# Altium PCB 远程医疗完成2014-11-06.PcbDoc
Units mm, origin at the board's own origin, x right, y up, seen from the top; angles counter-clockwise.
Board outline 50 x 100 mm, 4 copper layers (Top Layer, Internal Plane 1, Internal Plane 2, Bottom Layer); 81 components, 84 nets, 357 pads, 200 vias.
Unrouted connection lines stored in the file: 8.
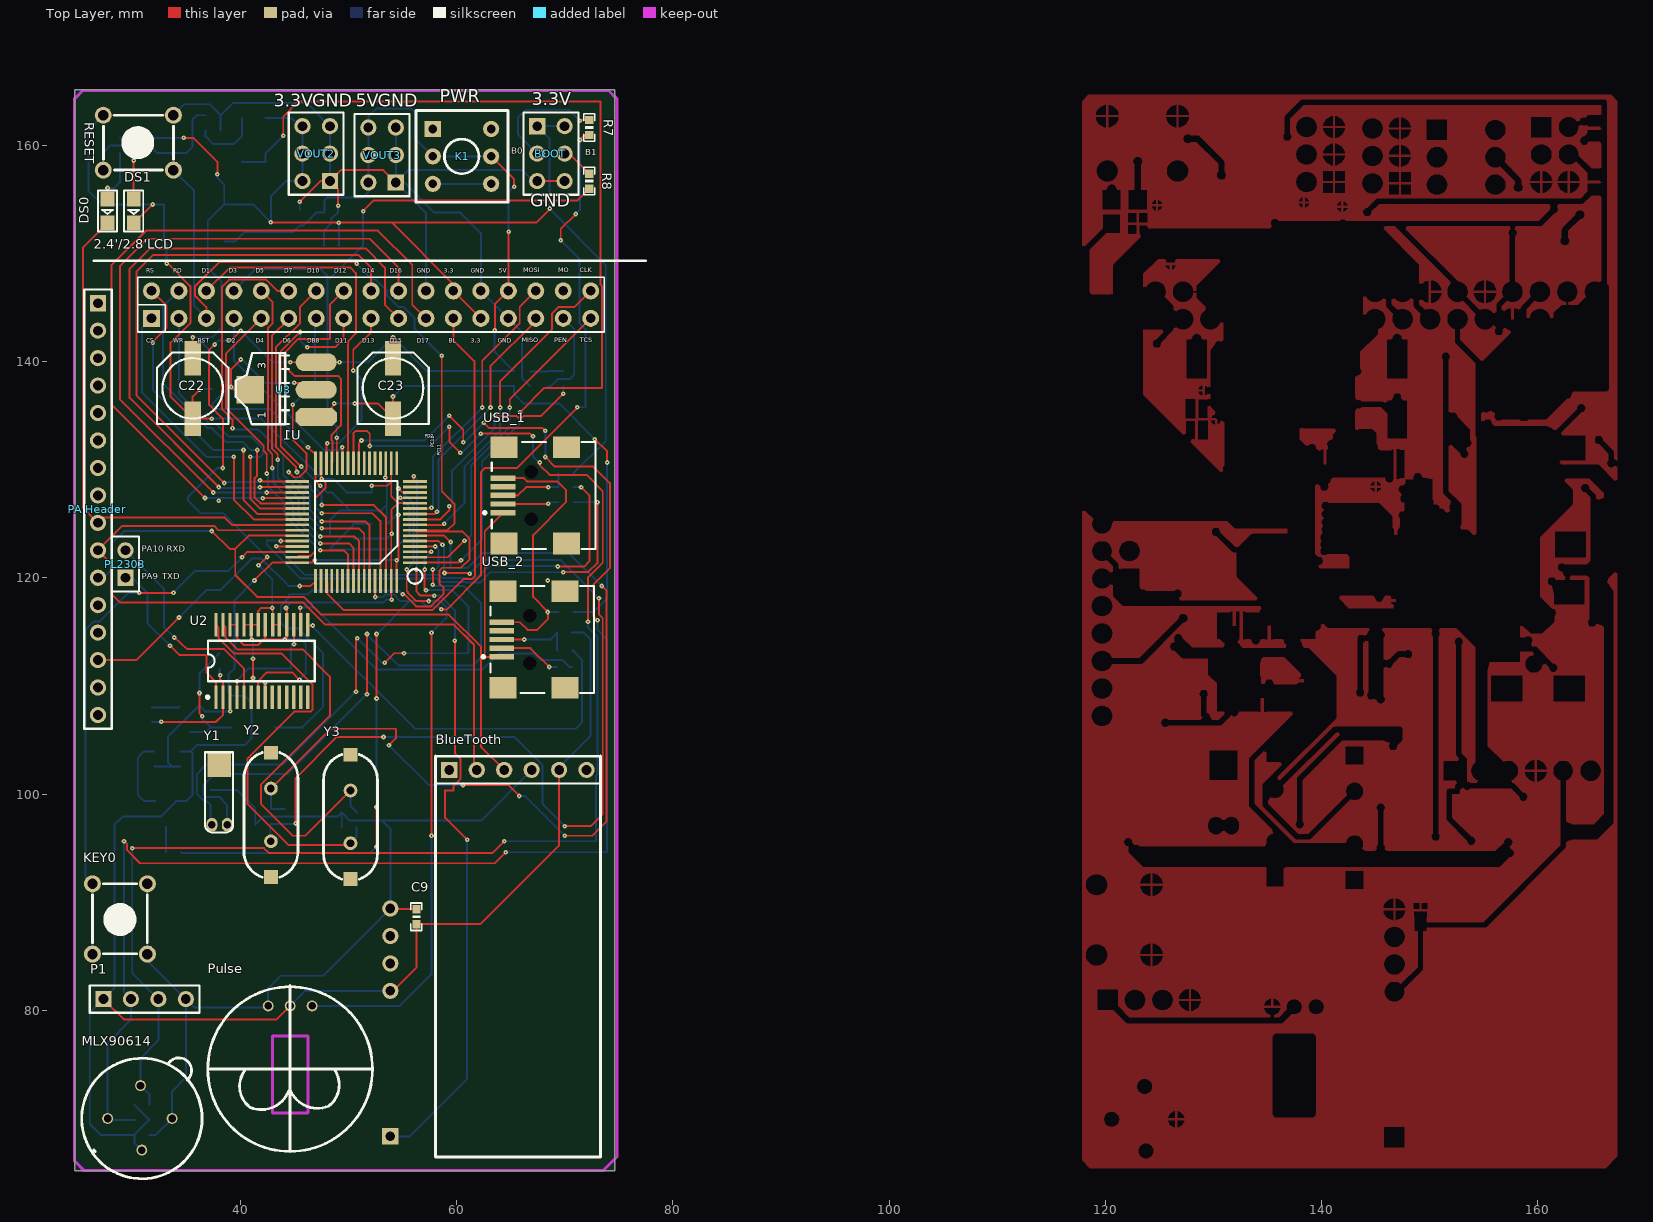
[diagram p0: Top Layer view]
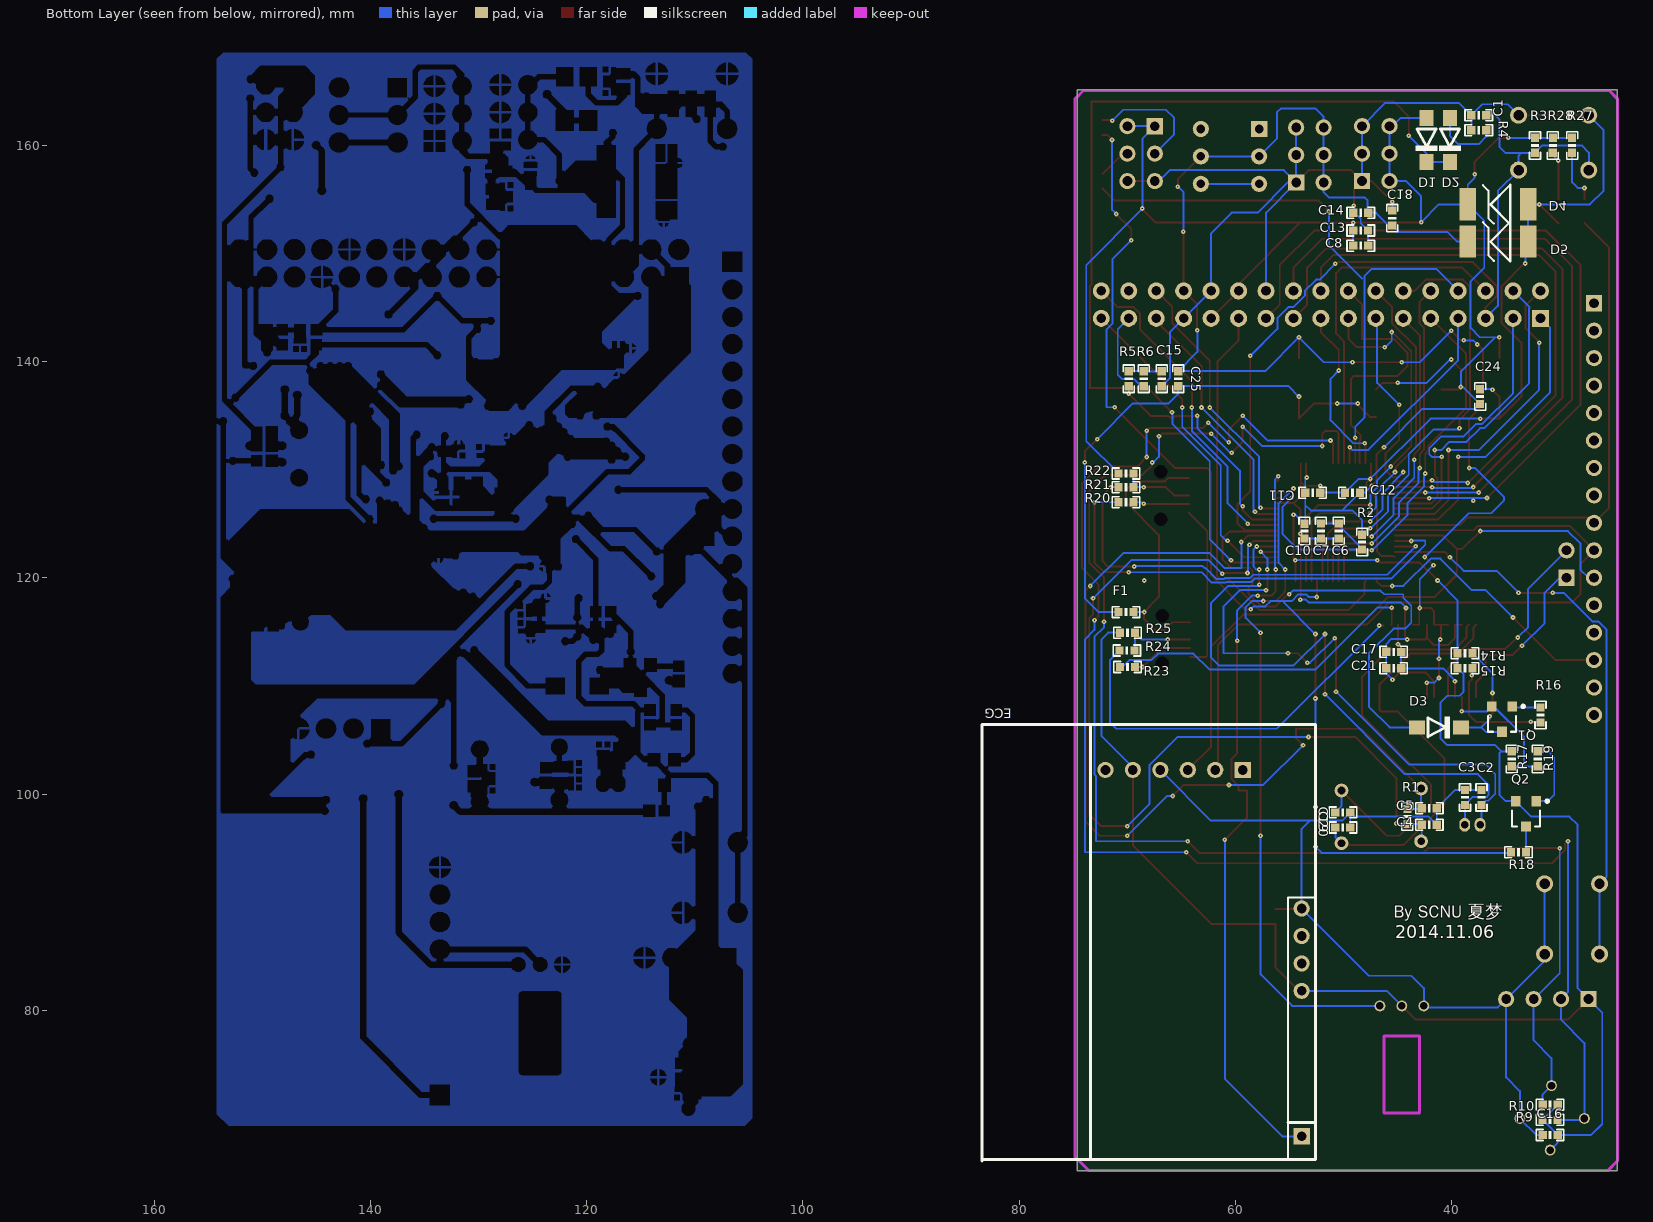
[diagram p1: Bottom Layer view, seen from below]
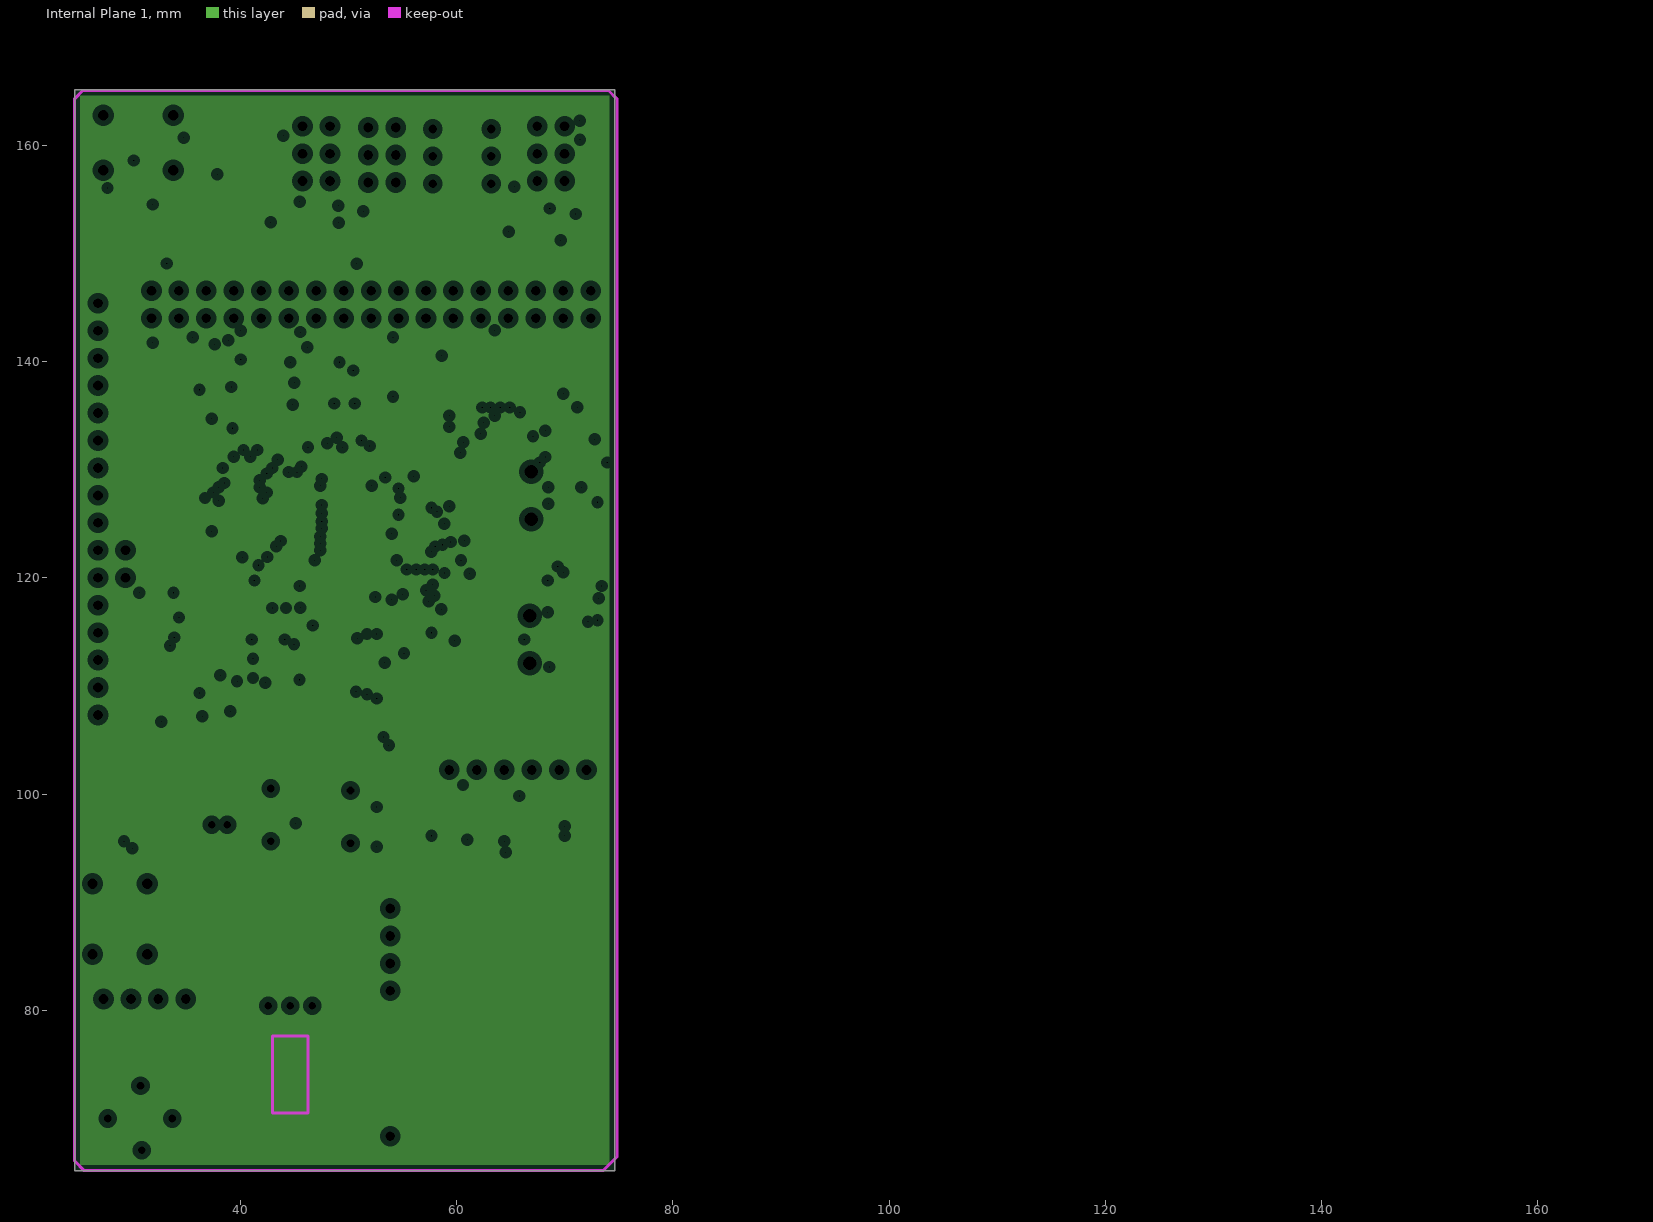
[diagram p2: Internal Plane 1, clearances drawn from the general rule]
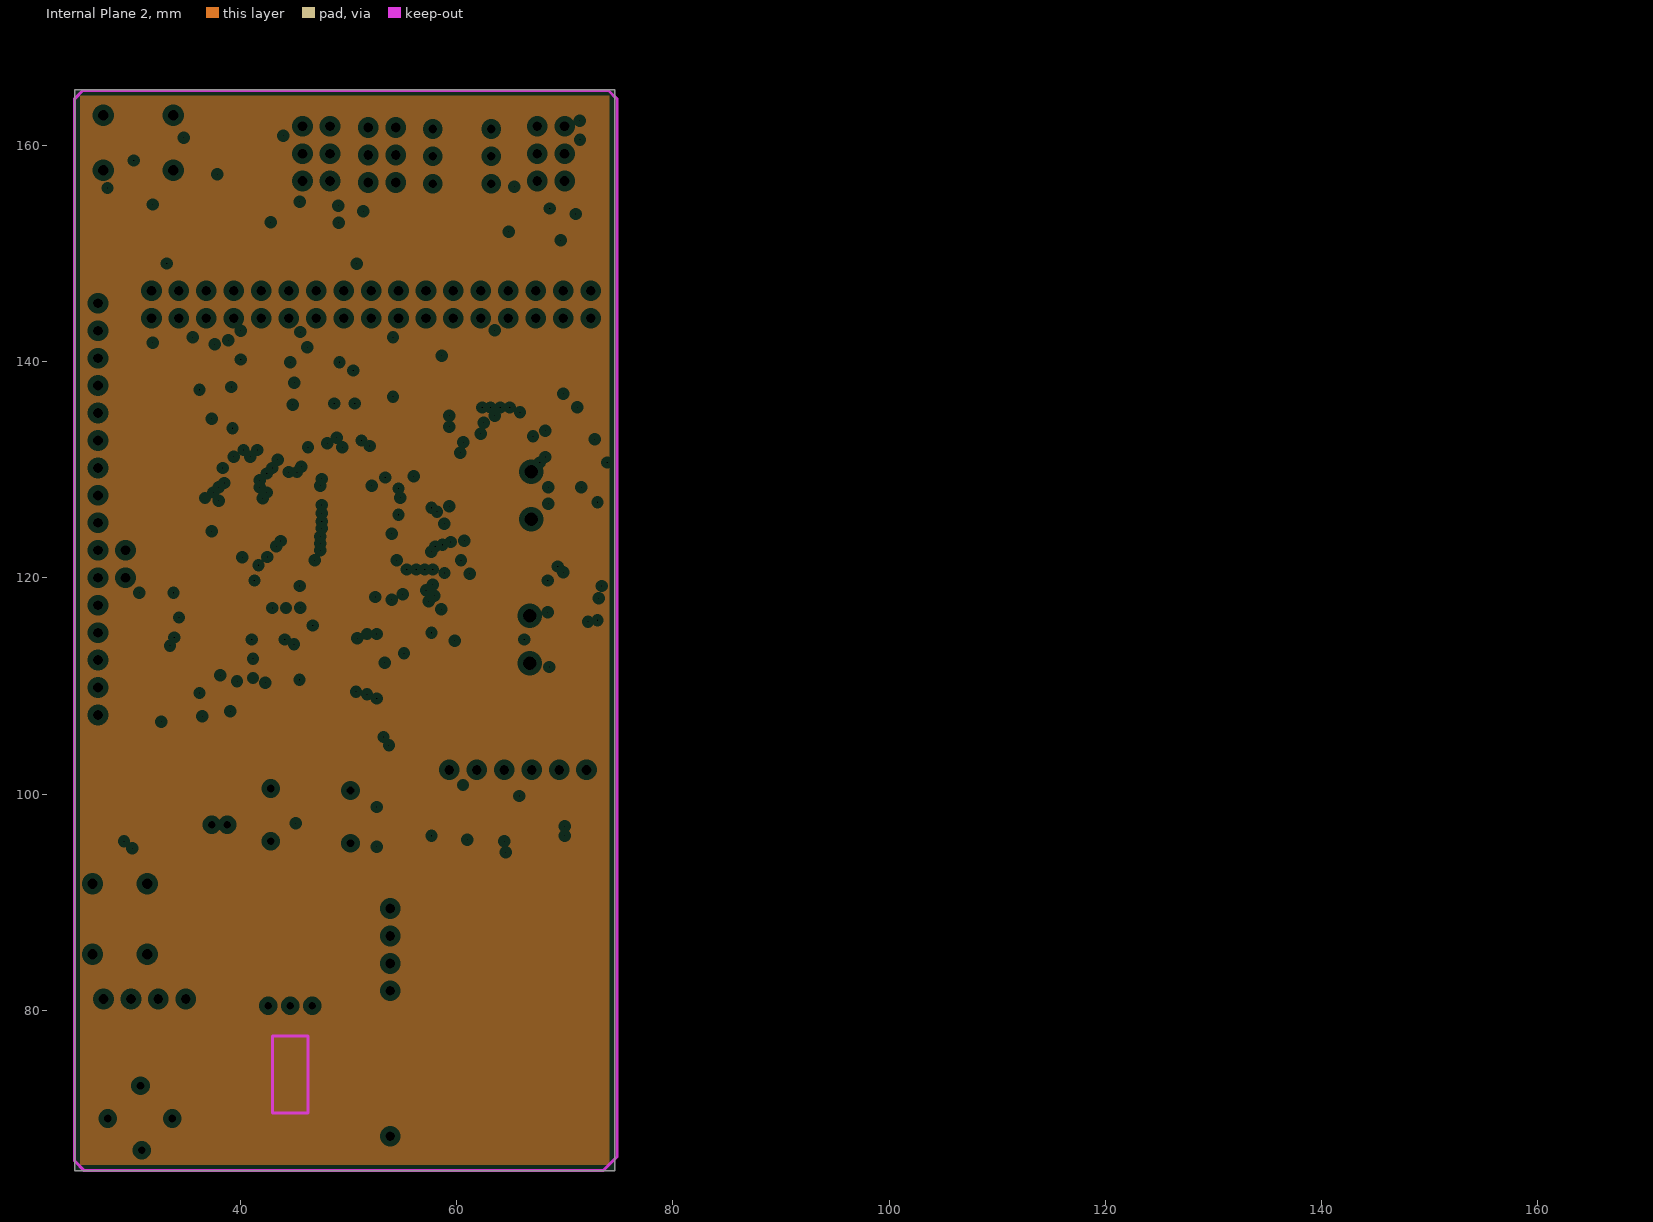
[diagram p3: Internal Plane 2, clearances drawn from the general rule]

## Layer stack, top to bottom
Top Layer: signal copper 0.0356
Dielectric: dielectric 0.32, FR-4, Dk 4.8
Internal Plane 1: plane copper 0.0356
Dielectric: dielectric 0.32, FR-4, Dk 4.8
Internal Plane 2: plane copper 0.0356
Dielectric: dielectric 0.32, FR-4, Dk 4.8
Bottom Layer: signal copper 0.0356

## Board outline
24.638,65.151 74.638,65.151 74.638,165.151 24.638,165.151

## Design rules (kind name [scope] priority, off if disabled: settings)
Clearance [All] p1: gap=0.178
HoleSize [All] p1: absolutevalues=TRUE maxlimit=6.3 minlimit=0.3 maxpercent=80.000 minpercent=20.000
HoleToHoleClearance [All] p1 off: gap=0.254 allowstackedmicrovias=FALSE
LayerPairs [All] p1 off: enforce=TRUE
MinimumSolderMaskSliver [All] p1 off: minsoldermaskwidth=0.254
NetAntennae [All] p1 off: netantennaetolerance=0
PlaneClearance [All] p1: clearance=0.508
PlaneConnect [All] p1: planeconnectstyle=Relief reliefexpansion=0.508 reliefentries=4 reliefconductorwidth=0.254 reliefairgap=0.254
PolygonConnect [All] p1: connectstyle=Relief reliefconductorwidth=0.254 reliefentries=4 polygonreliefangle="90 Angle" airgapwidth=0.254
RoomDefinition 远程医疗 [InComponentClass('远程医疗')] p1: confinementstyle=ConfineIn formatcopy=TRUE lockcomponents=FALSE outline 0,0 50.8,0 50.8,25.4 0,25.4
RoutingVias [All] p1: holewidth=0.127 width=0.432 viastyle="Through Hole" minholewidth=0.127 minwidth=0.432 maxholewidth=0.127 maxwidth=0.432
SilkToSilkClearance [All] p1 off: silktosilkclearance=0.1
SilkToSolderMaskClearance [IsPad] p1 off: minsilkscreentomaskgap=0.1 clearancetoexposedcopper=TRUE
SolderMaskExpansion [All] p1: expansion=0.102
Width [All] p1: maxlimit=0.178 minlimit=0.178 preferedwidth=0.178
19 further rules are at their usual default settings.

## Components (designator, comment, footprint, x,y, rotation, side; value= is the part's Value field where it differs from the comment)
2.4'/2.8'LCD "TFT_LCD" DB2*17 57.15,118.618 r0 top
BlueTooth "BlueTooth" BlueTooth 59.309,102.235 r0 top
BOOT "VCC5" HDR2X3 67.437,161.798 r270 top
C1 "104" 0603P#1 37.465,162.814 r180 bottom
C2 "22pF" 0603P#1 37.211,99.695 r270 bottom
C3 "22pF" 0603P#1 38.735,99.695 r270 bottom
C4 "22pF" 0603P#1 42.037,97.155 r0 bottom
C5 "22pF" 0603P#1 42.037,98.679 r0 bottom
C6 "104" 0603P#1 50.419,124.333 r90 bottom
C7 "10u" 0603P#1 52.07,124.333 r90 bottom
C8 "104" 0603P#1 48.387,150.749 r180 bottom
C9 "104" 0603P#1 56.261,88.646 r90 top
C10 "104" 0603P#1 53.594,124.333 r270 bottom
C11 "104" 0603P#1 52.832,127.889 r180 bottom
C12 "104" 0603P#1 49.149,127.889 r0 bottom
C13 "104" 0603P#1 48.387,152.146 r0 bottom
C14 "104" 0603P#1 48.387,153.797 r180 bottom
C15 "22pF" 0603P#1 66.802,138.43 r270 bottom
C16 "100nF" 0603P#1 30.861,68.453 r180 bottom
C17 "104" 0603P#1 45.339,113.157 r180 bottom
C18 "104" 0603P#2 45.466,153.289 r90 bottom
C19 "22" 0603P#1 50.038,98.298 r0 bottom
C20 "22" 0603P#1 50.038,96.901 r0 bottom
C21 "10u" 0603P#1 45.339,111.633 r180 bottom
C22 "220uF" CC6.56.5 35.56,137.541 r270 top
C23 "220uF" CC6.56.5 54.102,137.541 r270 top
C24 "104" 0603P#1 37.338,136.779 r270 bottom
C25 "104" 0603P#1 65.278,138.43 r90 bottom
D1 "1N4148" DIODE_SOP 42.291,160.528 r270 bottom
D2 "1N4148" DIODE_SOP 40.132,160.528 r270 bottom
D3 "1N4148" DIODE_SOP 41.148,106.172 r180 bottom
D4 "SMBJ5.0A" SMBJ 35.56,154.559 r0 bottom
D5 "SMBJ3.3A" SMBJ 35.56,151.13 r0 bottom
DS0 "LED0" SMDLED 27.688,155.068 r270 top
DS1 "PWR" SMDLED 30.101,155.068 r270 top
ECG "ECG" ECG 53.848,68.326 r90 bottom
F1 "500mA" 0603P#1 70.104,116.84 r180 bottom
K1 "BUTTON" BTN8.5*8.5 57.785,161.544 r0 top
KEY0 "KEY_M" KEY_M 31.369,91.694 r270 top
MLX90614 "MLX90614" MLX90614 30.734,73.025 r90 top
P1 "Header 4" HDR1X4 27.305,81.026 r0 top
"PA Header" "Header 16" HDR1X16 26.797,145.415 r270 top
PL2303 "UART" HDR1X2 29.337,120.015 r90 top
Pulse "Pulse" Pulse 46.609,80.391 r180 top
Q1 "8050" SOT-23R 35.306,107.061 r0 bottom
Q2 "8550" SOT-23R 33.083,98.298 r0 bottom
R1 "1M" 0603P#1 44.069,97.917 r90 bottom
R2 "10R" 0603P#1 48.26,123.317 r270 bottom
R3 "10K" 0603P#1 32.258,160.02 r90 bottom
R4 "0R" 0603P#1 37.465,161.417 r180 bottom
R5 "4.7K" 0603P#1 69.85,138.43 r90 bottom
R6 "10R" 0603P#1 68.453,138.43 r270 bottom
R7 "100K" 0603P#1 72.263,161.671 r90 top
R8 "100K" 0603P#1 72.263,156.718 r270 top
R9 "4.7K" 0603P#1 30.861,69.85 r0 bottom
R10 "4.7K" 0603P#1 30.861,71.247 r180 bottom
R14 "10K" 0603P#1 38.735,113.03 r180 bottom
R15 "10K" 0603P#1 38.735,111.633 r0 bottom
R16 "1K" 0603P#1 31.75,107.315 r90 bottom
R17 "10K" 0603P#1 34.417,103.251 r90 bottom
R18 "1K" 0603P#1 33.782,94.615 r0 bottom
R19 "1K" 0603P#1 32.004,103.251 r90 bottom
R20 "22R" 0603P#1 70.104,127 r180 bottom
R21 "22R" 0603P#1 70.104,128.397 r180 bottom
R22 "1.5K" 0603P#1 70.104,129.667 r180 bottom
R23 "22R" 0603P#1 69.977,111.76 r180 bottom
R24 "22R" 0603P#1 70.028,113.284 r180 bottom
R25 "1.5K" 0603P#1 69.977,114.935 r180 bottom
R27 "510" 0603P#1 28.829,160.02 r90 bottom
R28 "510" 0603P#1 30.607,160.02 r90 bottom
RESET "KEY_M" KEY_M 33.782,157.734 r180 top
U1 "STM32F103RCT6" LQFP64 56.134,121.412 r180 top
U2 "PL2303" ssop28 37.719,108.966 r90 top
U3 "AMS1117-3.3" AMS1117 46.99,134.874 r90 top
USB_1 "USB" USB/SM0.8-6H5 72.136,127.635 r0 top
USB_2 "USB" USB/SM0.8-6H5 72.009,114.3 r0 top
VOUT2 "VCC3.3" HDR2X3 48.26,156.718 r90 top
VOUT3 "VCC5" HDR2X3 54.356,156.591 r90 top
Y1 "32.768MHz" "XTAL 32M" 37.338,97.155 r90 top
Y2 "8MHz" XTAL_US 42.799,95.631 r90 top
Y3 "12MHz" XTAL_US 50.165,100.33 r270 top

## Footprints (in the part's own frame and the unit in brackets; to place one, negate y for a bottom-side part, rotate by r counter-clockwise, add the part's x,y. Pads: shape width x height; smd on the part's side, far side on the other; paste and mask are expansions set on the pad)
0603P#1 [mil]
  rect 30x30 smd: 1(-27,0) 2(27.5,-0.06)
  silkscreen extent -50,-20 50,20
0603P#2 [mil]
  rect 30x30 smd: 1(-27,0) 2(27.5,0.06)
  silkscreen extent -50,-20 50,20
AMS1117 [mil]
  oct 65x150 smd: 1(0.03,-0.06)
  oval 65x150 smd: 2(100.03,-0.06) 3(200.03,-0.06)
  rect 100x100 smd: 4(100.03,239.94)
  silkscreen extent -26,100 234,293
BlueTooth [mm]
  rect 1.5x1.5 hole 0.9: 1(0,0)
  round 1.5 hole 0.9: 2(2.54,0) 3(5.08,0) 4(7.62,0) 5(10.16,0) 6(12.7,0)
  silkscreen extent -1.27,-35.81 13.97,1.27
BTN8.5*8.5 [mm]
  rect 1.5x1.5 hole 0.8: 1(0,0)
  round 1.5 hole 0.8: 2(0,-2.54) 3(0,-5.08) 4(5.4,-5.08) 5(5.4,-2.54) 6(5.4,0)
  silkscreen extent -1.55,-6.79 6.95,1.71
CC6.56.5 [mm]
  rect 3.2x1.5 smd: 1(-2.794,0) 2(2.8,0)
  silkscreen extent -3.3,-3.3 3.3,3.3
DB2*17 [mil]
  rect 62x62 hole 35: 1(-1000,1000)
  round 62 hole 35: 2(-1000,1100) 3(-900,1000) 4(-900,1100) 5(-800,1000) 6(-800,1100) 7(-700,1000) 8(-700,1100) 9(-600,1000) 10(-600,1100) 11(-500,1000) 12(-500,1100) 13(-400,1000) 14(-400,1100) 15(-300,1000) 16(-300,1100) 17(-200,1000) 18(-200,1100) 19(-100,1000) 20(-100,1100) 21(0,1000) 22(0,1100) 23(100,1000) 24(100,1100) 25(200,1000) 26(200,1100) 27(300,1000) 28(300,1100) 29(400,1000) 30(400,1100) 31(500,1000) 32(500,1100) 33(600,1000) 34(600,1100)
  round 133.86 on Top Overlay: ""(-1080,-1935) ""(675,-1935)
  silkscreen extent -1210,-2035 800,1210
DIODE_SOP [mm]
  rect 1.5x1.3 smd: 1(-2.032,0) 2(2.032,0)
  silkscreen extent -1.02,-1.02 1.02,1.02
ECG [mm]
  rect 1.5x1.5 hole 0.9: 1(0,0)
  round 1.5 hole 0.9: 2(13.462,0) 3(16.002,0) 4(18.542,0) 5(21.082,0)
  silkscreen extent -2.29,-1.27 38.1,29.59
HDR1X2 [mm] "Connector; Header; 2 Position"
  rect 1.5x1.5 hole 0.9: 1(0,0)
  round 1.5 hole 0.9: 2(2.54,0)
  silkscreen extent -1.27,-1.27 3.81,1.27
HDR1X4 [mm] "Connector; Header; 4 Position"
  rect 1.5x1.5 hole 0.9: 1(0,0)
  round 1.5 hole 0.9: 2(2.54,0) 3(5.08,0) 4(7.62,0)
  silkscreen extent -1.27,-1.27 8.89,1.27
HDR1X16 [mm]
  rect 1.5x1.5 hole 0.9: 1(0,0)
  round 1.5 hole 0.9: 2(2.54,0) 3(5.08,0) 4(7.62,0) 5(10.16,0) 6(12.7,0) 7(15.24,0) 8(17.78,0) 9(20.32,0) 10(22.86,0) 11(25.4,0) 12(27.94,0) 13(30.48,0) 14(33.02,0) 15(35.56,0) 16(38.1,0)
  silkscreen extent -1.27,-1.27 39.37,1.27
HDR2X3 [mm]
  rect 1.5x1.5 hole 0.9: 1(0,0)
  round 1.5 hole 0.9: 2(0,2.54) 3(2.54,0) 4(2.54,2.54) 5(5.08,0) 6(5.08,2.54)
  silkscreen extent -1.27,-1.27 6.35,3.81
KEY_M [mil]
  round 62 hole 38: 1(0,0) 1(255.91,0) 2(0,-200) 2(255.91,-200)
  silkscreen extent 0,-200 255,0
LQFP64 [mm] "LQFP64"
  rect 2.2x0.254 smd: 1(0,0) 2(0,-0.5) 3(0,-1) 4(0,-1.5) 5(0,-2) 6(0,-2.5) 7(0,-3) 8(0,-3.5) 9(0,-4) 10(0,-4.5) 11(0,-5) 12(0,-5.5) 13(0,-6) 14(0,-6.5) 15(0,-7) 16(0,-7.5) 33(10.9,-7.5) 34(10.9,-7) 35(10.9,-6.5) 36(10.9,-6) 37(10.9,-5.5) 38(10.9,-5) 39(10.9,-4.5) 40(10.9,-4) 41(10.9,-3.5) 42(10.9,-3) 43(10.9,-2.5) 44(10.9,-2) 45(10.9,-1.5) 46(10.9,-1) 47(10.9,-0.5) 48(10.9,0)
  rect 0.254x2.2 smd: 17(1.7,-9.2) 18(2.2,-9.2) 19(2.7,-9.2) 20(3.2,-9.2) 21(3.7,-9.2) 22(4.2,-9.2) 23(4.7,-9.2) 24(5.2,-9.2) 25(5.7,-9.2) 26(6.2,-9.2) 27(6.7,-9.2) 28(7.2,-9.2) 29(7.7,-9.2) 30(8.2,-9.2) 31(8.7,-9.2) 32(9.2,-9.2) 49(9.2,1.7) 50(8.7,1.7) 51(8.2,1.7) 52(7.7,1.7) 53(7.2,1.7) 54(6.7,1.7) 55(6.2,1.7) 56(5.7,1.7) 57(5.2,1.7) 58(4.7,1.7) 59(4.2,1.7) 60(3.7,1.7) 61(3.2,1.7) 62(2.7,1.7) 63(2.2,1.7) 64(1.7,1.7)
  silkscreen extent -0.68,-7.56 9.27,1.95
MLX90614 [mm]
  round 1 hole 0.7: 1(0,0) 2(-3.048,3.048) 3(-5.969,-0.127) 4(-3.048,-2.921)
  silkscreen extent -8.62,-5.7 2.56,5.44
Pulse [mm]
  round 1 hole 0.7: 1(0,0) 2(2.032,0) 3(4.064,0)
  silkscreen extent -5.59,-1.9 9.65,13.46
SMBJ [mm]
  rect 1.5x3 smd: 1(-2.667,0) 2(2.921,0)
  silkscreen extent -1.02,-1.83 1.52,1.85
SMDLED [mm]
  rect 1.4x1.27 smd: 1(0.001,-0.002) 2(2.211,-0.002)
  silkscreen extent -0.8,-0.89 3.01,0.89
SOT-23R [mm]
  rect 0.9x0.95 smd: 1(0.95,-1.048) 2(-0.95,-1.048) 3(0,1.302)
  silkscreen extent -2.07,-1.17 1.3,1.3
ssop28 [mm]
  rect 2.15x0.305 smd: 1(0,0) 2(0,-0.65) 3(0,-1.3) 4(0,-1.95) 5(0,-2.6) 6(0,-3.25) 7(0,-3.9) 8(0,-4.55) 9(0,-5.2) 10(0,-5.85) 11(0,-6.552) 12(0,-7.202) 13(0,-7.852) 14(0,-8.502) 15(6.7,-8.502) 16(6.7,-7.852) 17(6.7,-7.202) 18(6.7,-6.552) 19(6.7,-5.85) 20(6.7,-5.252) 21(6.7,-4.55) 22(6.7,-3.9) 23(6.7,-3.25) 24(6.7,-2.6) 25(6.7,-1.95) 26(6.7,-1.3) 27(6.7,-0.65) 28(6.7,0)
  silkscreen extent -0.12,-9.14 5.22,0.9
USB/SM0.8-6H5 [mm]
  rect 2.3x0.5 smd: 1(-7.85,-1.6) 2(-7.85,-0.8) 3(-7.85,0) 4(-7.85,0.8) 5(-7.85,1.6)
  rect 2.5x2 smd: 6(-7.75,4.45) 7(-1.996,4.45) 8(-7.75,-4.45) 9(-1.996,-4.45)
  round 0.6 hole 1.27 unplated: MH1(-5.25,2.2) MH2(-5.25,-2.2)
  silkscreen extent -9.67,-4.95 0.7,4.95
"XTAL 32M" [mil]
  oval 50x40 hole 28: 1(0,0) 2(0,-56)
  rect 92.13x86 smd: ""(220,-27)
  silkscreen extent -28,-77 264,25
XTAL_US [mil]
  round 50 hole 28: 1(0,0) 2(192.13,0)
  rect 50x50 smd: ""(-130.32,0) ""(322.44,0)
  silkscreen extent -131,-98 323,98

## Part data
BOOT VOUT2 VOUT3: library part "Header 3X2", "Header, 3-Pin, Dual row"
C1 C2 C3 C4 C5 C6 C7 C8 C9 C10 C11 C12 C13 C14 C15 C16 C17 C18 C19 C20 C21 C24 C25: library part C
C22 C23: library part CAP
D1 D2 D3: library part D
D4 D5: library part SMBJ, "TVS"
DS0 DS1: library part LED2, "Typical RED, GREEN, YELLOW, AMBER GaAs LED"
F1 R1 R2 R3 R4 R5 R6 R7 R8 R9 R10 R14 R15 R16 R17 R18 R19 R20 R21 R22 R23 R24 R25 R27 R28: library part R
P1: "Header, 4-Pin"
"PA Header": "Header, 16-Pin"
PL2303: library part "Header 2", "Header, 2-Pin"
Q1: library part NPN, "8050/BCW846/BCW847"
Q2: library part PNP, "8550/BCW68"
U1: library part STM32F103RBT6
U3: library part AMS1117
USB_1 USB_2: library part USB5
Y1 Y2 Y3: library part XTAL, "Crystal Oscillator"

## Via types
v1: diameter 0.432, hole 0.127, Top Layer to Bottom Layer, 200 vias

## Nets (pads, with @x,y where several pads share a name; then routed paths per layer and width w, separated by ;. In a path a pad name is that pad's centre, name@x,y a point inside that pad or via, vN(x,y) a via of type N, cw(c..) or ccw(c..) an arc to the next point about the centre after c; other vN are vias at no path point)
3V3: C17.2 C21.2 U2.4 U2.17 | length 11.2
  Top Layer w0.178: v1@39.624,110.49 v1(39.669,110.445) U2.4 ; v1(44.933,113.868) U2.17@44.933,115.654
  Bottom Layer w0.178: v1@39.624,110.49 40.765,111.631 C21.2 C17.2 44.64,113.576 v1(44.933,113.868)
BOOT0: R7.1 R18.2 U1.60 | length 104.7
  Top Layer w0.178: U1.60 52.434,118.254 v1(52.451,118.237) ; v1(52.578,95.123) v1(52.578,98.806) ; v1(52.578,108.839) v1(52.578,114.808) ; v1(58.547,117.094) 59.097,117.094 62.23,120.227 62.23,129.794 62.611,130.175 65.579,130.175 71.145,135.741 v1(71.145,135.788) ; v1(69.621,151.257) 69.621,152.298 v1@70.993,153.67 ; v1(71.399,160.528) 71.857,160.985 R7.1
  Bottom Layer w0.178: R18.2 34.549,94.548 52.003,94.548 v1(52.578,95.123) ; v1(52.451,118.237) 53.218,118.237 53.447,118.466 54.175,118.466 54.784,117.856 55.499,117.856 ; v1(52.578,98.806) v1(52.578,108.839) ; v1(52.578,114.808) 55.499,117.729 55.499,117.856 ; v1(58.547,117.094) 58.268,117.373 57.204,117.373 56.722,117.856 55.499,117.856 ; v1@69.609,151.244 71.336,149.517 71.336,143.581 71.907,143.01 71.907,135.788 v1(71.145,135.788) ; v1(71.018,153.67) 71.399,154.051 v1(71.399,160.528)
BOOT1: 2.4'/2.8'LCD.8 R8.2 U1.28 | length 56.7
  Top Layer w0.178: U1.28@48.895,130.651 v1(48.895,132.969) ; v1@51.321,153.937 52.324,154.94 71.182,154.94 R8.2
  Bottom Layer w0.178: 2.4'/2.8'LCD.8 41.402,148.59 47.371,148.59 48.044,147.917 48.044,134.836 48.895,133.985 v1(48.895,132.969) ; 48.26,147.701 51.333,150.774 v1(51.333,153.924)
"BT RXD": "PA Header.11" BlueTooth.2 U1.43 | length 71.3
  Top Layer w0.178: 45.234,124.412 37.942,124.412 37.538,124.816 29.058,124.816 26.797,122.555 28.067,121.285 28.067,118.491 28.828,117.73 45.762,117.73 47.795,115.697 59.69,115.697 61.595,113.792 61.595,102.489 BlueTooth.2
"BT TXD": "PA Header.10" BlueTooth.3 U1.42 | length 63.5
  Top Layer w0.178: v1(37.338,124.333) 38.989,122.682 39.497,122.682 ; 45.234,123.912 40.727,123.912 39.497,122.682 ; BlueTooth.3 62.23,104.394 62.23,113.66 59.278,116.611 47.473,116.611 45.847,118.237 41.529,118.237 39.497,120.269 39.497,122.682
  Bottom Layer w0.178: 26.289,120.015 27.305,120.015 28.067,120.777 28.067,123.19 29.21,124.333 v1(37.338,124.333)
ECG: ECG.1 U1.16 | length 70.4
  Top Layer w0.178: v1(56.007,129.413) 56.007,129.039 U1.16 ; v1(56.261,120.777) 56.261,118.745 56.642,118.364 v1(57.912,118.364) ; v1(59.817,114.173) 59.817,103.76 60.326,103.252 60.326,101.375 59.69,100.739 59.69,100.33 58.928,100.33 58.928,97.79 v1(60.96,95.758)
  Bottom Layer w0.178: ECG.1 55.626,68.326 60.96,73.66 v1(60.96,95.758) ; v1(56.007,129.413) 56.337,129.083 56.337,120.853 v1(56.261,120.777) ; v1(57.912,118.364) 58.462,118.364 59.817,117.009 v1(59.817,114.173)
GND: 2.4'/2.8'LCD.22 2.4'/2.8'LCD.26 2.4'/2.8'LCD.27 BlueTooth.4 BOOT.5 BOOT.6 C1.1 C2.1 C3.1 C4.1 C5.1 C6.1 C7.1 C8.2 C9.2 C10.2 C11.2 C12.2 C13.1 C14.1 C15.2 C16.1 C17.1 C18.2 C19.1 C20.1 C21.1 C22.2 C23.2 C24.1 C25.1 D4.1 D5.1 DS1.2 ECG.5 F1.1 KEY0.1 MLX90614.4 P1.4 Pulse.3 R4.1 RESET.2 U1.12 U1.18 U1.31 U1.47 U1.63 U2.7 U2.18 U2.21 U2.25 U2.26 U3.1 VOUT2.1 VOUT2.3 VOUT2.5 VOUT3.1 VOUT3.3 VOUT3.5 | length 382.6
  Top Layer w0.178: RESET.2@27.282,162.814 RESET.2@33.782,162.814 ; DS1.2 30.175,152.857 v1(31.877,154.559) ; v1(33.147,149.098) 33.241,149.098 35.344,146.995 35.344,143.581 33.528,141.765 33.528,136.773 C22.2 ; v1(36.195,137.414) 35.56,136.779 C22.2 ; v1(37.338,134.741) C22.2 ; U2.26 U2.25 39.673,115.662 39.673,114.427 40.308,113.792 41.612,113.792 42.269,114.449 ; U2.7 41.619,110.453 42.418,111.252 44.755,111.252 v1(45.441,110.566) ; U2.21 42.269,114.449 ; v1(44.196,117.221) 44.271,117.146 U2.18 44.271,114.502 v1(44.069,114.3) 42.418,114.3 42.269,114.449 ; U1.47 45.34,122.018 46.444,122.018 46.888,122.462 46.888,127.359 47.854,128.324 47.854,128.803 v1(47.498,129.159) 47.434,129.223 U1.31 ; v1(45.466,154.813) 47.371,156.718 VOUT2.1 ; U3.1 47.499,134.875 v1@48.641,136.017 ; v1(49.022,154.432) 49.022,155.956 VOUT2.1 ; v1(50.546,136.144) 52.699,136.144 C23.2 v1(54.102,136.779) ; v1(52.121,128.524) 53.553,128.524 53.934,128.905 ; ECG.5 53.911,89.344 C9.2 ; U1.18 53.934,128.905 ; v1(53.975,117.983) 53.934,118.024 U1.63 53.934,124.038 v1(53.975,124.079) 53.975,126.336 54.568,126.929 ; VOUT3.1 53.213,157.734 49.276,157.734 VOUT2.1 ; U1.12 56.117,126.929 54.568,126.929 ; BOOT.5 BOOT.6 ; v1@72.771,132.842 73.914,131.699 v1(73.914,130.683) ; 53.934,128.905 53.934,127.563 54.568,126.929
  Bottom Layer w0.178: RESET.2@27.282,162.814 25.908,161.44 25.908,155.829 27.178,154.559 v1(31.877,154.559) D4.1 D5.1 33.147,150.876 v1(33.147,149.098) ; KEY0.1@31.369,91.694 31.369,85.194 31.369,84.582 P1.4 ; C16.1 32.131,68.453 MLX90614.4 33.655,72.517 34.925,73.787 P1.4 ; RESET.2@33.782,162.814 34.798,163.83 37.135,163.83 C1.1 ; v1@36.195,137.465 C24.1 ; C2.1 C3.1 39.649,100.381 C5.1 C4.1 42.113,97.917 48.971,97.917 C19.1 ; v1(37.338,134.741) 41.916,134.741 v1(47.498,129.159) 48.579,129.159 C12.2 52.13,127.891 C11.2 v1@52.133,128.511 ; R4.1 C1.1 ; v1(44.069,114.3) 44.12,114.351 45.542,114.351 46.025,113.868 C17.1 C21.1 46.025,111.176 v1@45.428,110.579 ; v1(44.196,117.221) 44.705,117.73 53.214,117.73 53.467,117.983 v1(53.975,117.983) ; C18.2 v1@45.468,154.811 ; C8.2@47.701,150.76 C13.1 48.387,152.832 48.387,153.213 49.022,153.848 v1(49.022,154.432) ; VOUT2.1 VOUT2.3 VOUT2.5 46.101,163.957 39.294,163.957 C1.1 ; v1(48.664,136.144) v1(50.546,136.144) ; C20.1 C19.1 ; C6.1 C7.1 53.583,123.647 53.975,124.039 v1(53.975,124.079) ; v1(54.102,136.779) 55.067,137.744 C25.1 65.278,137.033 66.167,136.144 69.472,136.144 v1(72.771,132.845) ; VOUT3.5 VOUT3.3 VOUT3.1 ; 2.4'/2.8'LCD.22 57.15,153.797 VOUT3.1 ; C15.2 66.04,138.495 66.04,142.748 2.4'/2.8'LCD.27 2.4'/2.8'LCD.26 62.23,151.892 60.325,153.797 57.912,153.797 55.118,156.591 VOUT3.1 ; BlueTooth.4 62.244,97.55 53.086,97.55 ; BOOT.5 67.056,156.718 66.04,157.734 55.499,157.734 VOUT3.1 ; F1.1 72.644,116.84 73.914,118.11 v1(73.914,130.683) ; P1.4 35.687,80.264 42.418,80.264 Pulse.3 42.545,82.042 43.688,83.185 47.625,83.185 ECG.5 53.848,96.788 53.086,97.55 ; C19.1 50.114,97.536 50.231,97.536 50.245,97.55 53.086,97.55
JTCK: "PA Header.14" U1.49 | length 25.3
  Top Layer w0.178: 26.797,112.395 30.353,112.395 v1(34.29,116.332) ; v1(45.466,119.253) 46.475,119.253 U1.49
  Bottom Layer w0.178: v1(34.29,116.332) 36.83,118.872 38.1,118.872 41.021,121.793 41.905,121.793 44.445,119.253 v1(45.466,119.253)
JTDI: U1.50
JTDO: 2.4'/2.8'LCD.9 U1.55 | length 31.6
  Top Layer w0.178: 2.4'/2.8'LCD.9 38.633,140.741 38.633,135.738 42.139,132.232 42.139,131.745 42.418,131.465 v1(42.418,129.667) ; v1(47.371,122.555) 49.53,122.555 49.934,122.151 U1.55
  Bottom Layer w0.178: v1(42.418,129.667) 42.545,129.54 42.545,128.452 44.069,126.928 44.069,125.81 47.324,122.555 v1(47.371,122.555)
JTMS: KEY0.2 U1.46 | length 52.9
  Top Layer w0.178: v1(30.607,118.618) v1(33.782,118.618) ; v1(40.132,121.92) 40.624,122.412 U1.46
  Bottom Layer w0.178: KEY0.2@26.289,85.194 26.289,91.694 25.654,92.329 25.654,115.23 26.376,115.952 26.925,115.952 29.591,118.618 v1(30.607,118.618) ; v1(33.782,118.618) 35.814,120.65 38.862,120.65 v1(40.132,121.92)
JTRST: 2.4'/2.8'LCD.10 U1.56 | length 32.3
  Top Layer w0.178: 2.4'/2.8'LCD.10 42.964,145.504 42.964,143.581 42.545,143.162 42.545,131.841 42.926,131.46 v1(42.926,130.175) ; v1(47.371,123.19) 50.038,123.19 50.434,122.794 U1.56
  Bottom Layer w0.178: v1(42.926,130.175) 43.053,130.048 43.053,128.778 44.831,127 44.831,125.683 47.324,123.19 v1(47.371,123.19)
"LCD BL": 2.4'/2.8'LCD.23 U1.51 | length 41.5
  Top Layer w0.178: U1.51 48.04,119.606 48.04,118.502 49.524,117.018 57.751,117.018 60.647,119.913 61.414,119.913 61.697,120.196 61.697,133.201 61.62,133.277 61.62,140.056 59.69,141.986 2.4'/2.8'LCD.23
"LCD CS": 2.4'/2.8'LCD.1 U1.40 | length 28.8
  Top Layer w0.178: v1@39.37,131.191 39.37,127.254 41.212,125.412 U1.40
  Bottom Layer w0.178: 2.4'/2.8'LCD.1 30.861,143.129 30.861,137.16 36.822,131.199 v1(39.37,131.199)
"LCD D0": 2.4'/2.8'LCD.6 U1.26 | length 32.9
  Top Layer w0.178: 2.4'/2.8'LCD.6 38.989,148.717 50.165,148.717 50.673,148.209 50.673,142.621 49.934,141.882 U1.26
"LCD D1": 2.4'/2.8'LCD.7 U1.27 | length 18.7
  Top Layer w0.178: U1.27 v1@49.434,131.922
  Bottom Layer w0.178: 2.4'/2.8'LCD.7 39.37,140.161 47.679,131.851 49.174,131.851 v1(49.403,132.08)
"LCD D5": 2.4'/2.8'LCD.11 U1.57 | length 30.1
  Top Layer w0.178: v1(43.434,130.937) 43.434,131.455 42.901,131.989 42.901,142.408 44.45,143.957 2.4'/2.8'LCD.11 ; v1(47.371,123.825) 50.546,123.825 50.934,123.437 U1.57
  Bottom Layer w0.178: v1(43.434,130.937) 43.434,129.286 45.339,127.381 45.339,125.857 v1(47.371,123.825)
"LCD D6": 2.4'/2.8'LCD.12 U1.58 | length 42.9
  Top Layer w0.178: v1(39.243,133.858) 39.243,134.625 38.278,135.59 38.278,146.957 38.933,147.612 42.347,147.612 43.401,146.558 2.4'/2.8'LCD.12 ; v1(47.498,124.587) 50.927,124.587 51.434,124.08 U1.58
  Bottom Layer w0.178: v1(39.243,133.858) 39.37,133.731 41.656,133.731 43.942,131.445 43.942,129.54 45.847,127.635 45.847,126.191 47.451,124.587 v1(47.498,124.587)
"LCD D7": 2.4'/2.8'LCD.13 U1.59 | length 33.1
  Top Layer w0.178: v1(44.45,129.794) 44.933,129.311 45.412,129.311 46.076,129.975 46.076,131.55 44.82,132.806 44.82,136.006 v1(44.831,136.017) ; v1(47.498,125.222) 51.544,125.222 51.934,124.832 U1.59
  Bottom Layer w0.178: v1@44.45,129.757 46.355,127.852 46.355,126.365 v1(47.498,125.222) ; v1(44.831,136.017) 46.863,138.049 46.863,143.891 2.4'/2.8'LCD.13
"LCD D8": 2.4'/2.8'LCD.14 U1.61 | length 35.2
  Top Layer w0.178: v1(45.212,129.794) 45.11,129.896 45.11,130.282 43.256,132.136 43.256,141.333 45.504,143.581 45.504,145.072 2.4'/2.8'LCD.14 ; v1(47.498,125.984) 52.197,125.984 52.934,125.247 U1.61
  Bottom Layer w0.178: v1(45.212,129.794) 46.533,128.473 46.533,128.177 46.99,127.72 46.99,126.492 v1(47.498,125.984)
"LCD D9": 2.4'/2.8'LCD.15 U1.62 | length 37.8
  Top Layer w0.178: v1(45.517,142.748) 45.471,142.748 43.713,140.99 43.713,132.182 v1(45.593,130.302) ; v1(46.152,141.351) 48.768,141.351 49.53,142.113 2.4'/2.8'LCD.15 ; v1(47.498,126.746) 52.324,126.746 53.434,125.636 U1.62
  Bottom Layer w0.178: v1(45.517,142.748) 45.517,141.935 v1@46.101,141.351 ; v1@45.657,130.238 46.888,129.007 46.888,128.324 47.498,127.715 v1(47.498,126.746)
"LCD D10": 2.4'/2.8'LCD.16 U1.29 | length 24.9
  Top Layer w0.178: U1.29 48.489,130.667 48.489,132.661 48.412,132.737 48.412,133.248 49.276,134.112 49.276,138.43 49.022,138.684 44.958,138.684 44.069,139.573 44.069,140.843 45.339,142.113 48.26,142.113 48.26,145.288 2.4'/2.8'LCD.16
"LCD D11": 2.4'/2.8'LCD.17 U1.30 | length 16.4
  Top Layer w0.178: U1.30 47.934,132.389 v1(48.006,132.461) ; v1(50.419,139.192) 50.419,141.097 52.07,142.748 2.4'/2.8'LCD.17
  Bottom Layer w0.178: v1(48.006,132.461) 49.069,132.461 51.181,134.573 51.181,138.43 v1(50.419,139.192)
"LCD D12": 2.4'/2.8'LCD.18 U1.33 | length 54.6
  Top Layer w0.178: v1@38.347,128.912 30.353,136.906 30.353,148.336 31.877,149.86 50.927,149.86 52.07,148.717 2.4'/2.8'LCD.18 ; v1(41.783,129.032) 41.903,128.912 U1.33
  Bottom Layer w0.178: v1(38.481,128.786) 38.575,128.88 41.631,128.88 v1(41.783,129.032)
"LCD D13": 2.4'/2.8'LCD.19 U1.34 | length 61.3
  Top Layer w0.178: v1@37.958,128.412 29.718,136.652 29.718,148.59 31.623,150.495 51.562,150.495 53.34,148.717 53.34,145.288 2.4'/2.8'LCD.19 ; v1@41.791,128.405 42.926,128.405 42.933,128.412 U1.34
  Bottom Layer w0.178: v1(37.973,128.405) 38.075,128.303 41.689,128.303 v1(41.783,128.397)
"LCD D14": 2.4'/2.8'LCD.20 U1.35 | length 62.4
  Top Layer w0.178: v1@37.442,127.912 28.829,136.525 28.829,148.844 31.369,151.384 51.943,151.384 54.61,148.717 2.4'/2.8'LCD.20 ; v1@42.433,127.912 U1.35
  Bottom Layer w0.178: v1(37.465,127.897) v1(42.418,127.897)
"LCD D15": 2.4'/2.8'LCD.21 U1.36 | length 69.5
  Top Layer w0.178: v1@36.672,127.412 28.067,136.017 28.067,148.971 31.242,152.146 52.705,152.146 55.88,148.971 55.88,145.288 2.4'/2.8'LCD.21 ; v1@42.068,127.412 U1.36
  Bottom Layer w0.178: v1(36.703,127.389) 42.029,127.389 v1(42.037,127.381)
  other v1: 37.973,127.127
"LCD RD": 2.4'/2.8'LCD.4 U1.37 | length 29.1
  Top Layer w0.178: v1@41.529,131.826 41.529,129.46 41.3,129.232 41.3,127.435 41.837,126.898 45.22,126.898 U1.37
  Bottom Layer w0.178: 2.4'/2.8'LCD.4 32.766,145.034 32.766,144.992 32.804,144.954 32.804,138.011 36.949,133.866 37.33,133.866 38.608,132.588 40.187,132.588 40.941,131.834 v1(41.529,131.834)
"LCD RS": 2.4'/2.8'LCD.2 U1.39 | length 31
  Top Layer w0.178: 2.4'/2.8'LCD.2 33.147,145.161 33.147,143.129 31.877,141.859 v1(31.877,141.757) ; v1@40.259,131.826 40.259,127.254 41.601,125.912 U1.39
  Bottom Layer w0.178: v1@31.877,141.732 31.877,137.414 37.457,131.834 v1(40.259,131.834)
"LCD WR": 2.4'/2.8'LCD.3 U1.38 | length 27.2
  Top Layer w0.178: v1@40.894,131.191 40.894,127.339 41.821,126.412 U1.38
  Bottom Layer w0.178: 2.4'/2.8'LCD.3 34.29,137.107 37.138,134.258 37.7,134.258 38.862,133.096 40.949,133.096 42.045,132 42.045,131.453 41.791,131.199 v1(40.894,131.199)
LED0: DS0.2 U1.41 | length 48.2
  Top Layer w0.178: DS0.2 25.4,150.571 25.4,126.492 26.797,125.095 27.305,125.603 38.496,125.603 39.187,124.912 U1.41
Net2.4'/2.8'LCD_31: 2.4'/2.8'LCD.31 R6.2 | length 8.5
  Bottom Layer w0.178: R6.2 68.698,137.731 69.359,138.392 70.447,138.392 70.866,138.811 70.866,143.002 2.4'/2.8'LCD.31
NetBOOT_3: BOOT.3 R7.2 | length 11.3
  Top Layer w0.178: v1@71.438,162.369 R7.2
  Bottom Layer w0.178: BOOT.3 65.659,161.036 65.659,162.56 66.421,163.322 70.358,163.322 v1(71.374,162.306)
NetBOOT_4: BOOT.4 R8.1 | length 3.1
  Top Layer w0.178: BOOT.4 70.409,159.258 R8.1
NetC2_2: C2.2 U1.3 Y1.1 | length 54
  Top Layer w0.178: v1(50.673,109.474) 50.673,114.3 v1(50.8,114.427) ; v1(53.34,112.141) 54.229,113.03 v1(55.118,113.03) ; U1.3 57.642,122.412 v1(57.647,122.417) ; v1(57.023,120.777) 57.023,118.999 v1(57.15,118.872)
  Bottom Layer w0.178: Y1.1@37.213,97.28 C2.2 36.832,99.377 36.572,99.377 35.941,100.009 35.941,101.854 36.83,102.743 43.942,102.743 v1(50.673,109.474) ; v1(50.8,114.427) 53.086,112.141 v1(53.34,112.141) ; v1(55.118,113.03) 61.087,113.03 61.087,117.348 59.563,118.872 v1(57.15,118.872) ; v1(57.023,120.777) 57.023,121.793 v1(57.647,122.417)
NetC3_2: C3.2 U1.4 Y1.2 | length 57.7
  Top Layer w0.178: v1(51.689,109.22) v1(51.689,114.808) ; U1.4 v1(58.015,122.912) ; v1(57.785,119.38) v1(57.785,120.777)
  Bottom Layer w0.178: Y1.2@38.737,97.179 C3.2 38,99.733 36.72,99.733 36.563,99.889 36.563,100.872 37.545,101.854 44.323,101.854 v1(51.689,109.22) ; v1(51.689,114.808) 54.61,111.887 61.468,111.887 62.255,112.674 62.255,117.666 60.656,119.266 57.899,119.266 v1(57.785,119.38) ; v1(57.785,120.777) 58.039,120.777 58.293,121.031 58.293,122.634 v1(58.015,122.912)
NetC4_2: C4.2 R1.1 U1.5 Y2.1 | length 85.8
  Top Layer w0.178: v1(45.085,97.282) 45.085,101.473 48.895,105.283 v1(53.213,105.283) ; U1.5 58.325,123.412 v1(58.674,123.063) ; v1(58.864,120.459) 61.151,120.459 v1(61.214,120.396) ; v1(69.977,97.028) 72.39,97.028 73.508,98.146 73.508,116.278 73.152,116.633 v1(73.152,118.11)
  Bottom Layer w0.178: Y2.1@42.735,95.694 C4.2 42.81,97.231 R1.1 45.034,97.231 v1(45.085,97.282) ; v1(53.213,105.283) 65.32,105.283 67.946,102.657 67.946,99.059 v1(69.977,97.028) ; v1(58.674,123.063) 58.801,122.936 58.801,120.523 v1(58.864,120.459) ; v1(61.214,120.396) 62.484,121.666 69.596,121.666 v1(73.152,118.11)
NetC5_2: C5.2 R1.2 U1.6 Y2.2 | length 86.6
  Top Layer w0.178: Y2.2 48.333,106.045 54.356,106.045 54.356,105.156 v1(53.721,104.521) ; U1.6 58.841,123.912 v1(59.436,123.317) ; v1(60.579,100.838) 64.77,100.838 v1(65.786,99.822) ; v1(69.977,96.139) 72.517,96.139 73.863,97.485 73.863,118.796 v1(73.406,119.253)
  Bottom Layer w0.178: C5.2@42.799,98.744 Y2.2 ; C5.2@42.801,98.615 R1.2 ; v1(53.721,104.521) 57.404,100.838 v1(60.579,100.838) ; v1(59.436,123.317) 59.436,120.904 60.96,120.904 62.357,122.301 70.358,122.301 v1(73.406,119.253) ; v1(65.786,99.822) 66.294,99.822 v1(69.977,96.139)
NetC6_2: C6.2 C7.2 R2.2 U1.13 | length 18
  Top Layer w0.178: v1(54.768,127.412) U1.13
  Bottom Layer w0.178: C7.2 C6.2 50.417,124.865 48.262,122.709 R2.2 54.165,122.618 55.626,124.079 55.626,126.554 v1(54.768,127.412)
NetC15_1: C15.1 R5.2 R6.1 | length 3
  Bottom Layer w0.178: C15.1 R6.1 ; R6.1@68.466,139.129 R5.2
NetC19_2: C19.2 U2.27 Y3.1 | length 40.4
  Top Layer w0.178: U2.27 38.6,115.435 38.6,114.481 39.72,113.36 45.771,113.36 48.26,110.871 48.26,107.247 41.897,100.884 41.897,99.073 44.831,96.139 45.974,96.139 Y3.1
  Bottom Layer w0.178: Y3.1 50.165,98.871 C19.2
NetC20_2: C20.2 U2.28 Y3.2 | length 39.1
  Top Layer w0.178: U2.28 37.95,115.435 37.95,114.481 39.426,113.005 43.787,113.005 46.64,110.151 46.64,107.781 46.484,107.624 44.955,107.624 40.64,103.309 40.64,99.065 44.404,95.301 50.016,95.301 Y3.2
  Bottom Layer w0.178: Y3.2 50.736,96.021 C20.2
NetD1_2: D1.2 D2.2 U1.1 | length 92.3
  Top Layer w0.178: v1(43.942,160.909) 43.942,162.687 45.339,164.084 73.279,164.084 73.279,147.16 73.444,146.995 73.444,137.579 68.11,137.579 v1@65.913,135.382 ; U1.1 60.173,121.412 v1(60.389,121.628)
  Bottom Layer w0.178: D2.2 D1.2 42.291,159.258 v1(43.942,160.909) ; v1@60.401,121.615 62.357,123.571 62.357,130.81 65.786,134.239 65.786,135.28 v1(65.849,135.344)
NetD2_1: D2.1 R4.2 | length 6.2
  Bottom Layer w0.178: R4.2 36.767,160.845 37.465,160.147 39.37,160.147 40.132,160.909 D2.1
NetD3_2: D3.2 Q1.3 R14.2 | length 12
  Top Layer w0.178: v1(36.195,109.347) 36.195,107.442 v1(36.449,107.188)
  Bottom Layer w0.178: Q1.3 36.798,105.759 37.211,106.172 ; v1(36.195,109.347) 36.195,111.187 R14.2 ; v1(36.449,107.188) 36.449,106.934 37.211,106.172 ; D3.2 37.211,106.172
NetDS0_1: DS0.1 R27.1 | length 5.1
  Top Layer w0.178: DS0.1 v1(27.686,156.083)
  Bottom Layer w0.178: v1(27.686,156.083) 28.321,156.083 28.829,156.591 R27.1
NetDS1_1: DS1.1 R28.1 | length 4.5
  Top Layer w0.178: DS1.1 v1(30.099,158.623)
  Bottom Layer w0.178: v1(30.099,158.623) 30.607,159.131 R28.1
NetF1_2: F1.2 USB_1.5 USB_2.5 | length 26
  Top Layer w0.178: USB_2.5 65.837,115.9 66.548,115.189 67.437,115.189 68.428,116.18 v1(68.428,116.838) 68.428,116.865 67.056,118.237 67.056,123.952 70.104,127 70.104,128.143 69.314,128.933 66.513,128.933 66.211,129.235 USB_1.5
  Bottom Layer w0.178: v1(68.428,116.838) F1.2
NetK1_3: K1.3 K1.4 USB_1.1 USB_2.1 | length 21
  Top Layer w0.178: USB_2.1 62.687,112.7 62.586,112.801 62.586,124.335 USB_1.1
  Bottom Layer w0.178: K1.3 K1.4
NetQ1_1: Q1.1 R17.1 R19.1 U2.3 | length 13.7
  Top Layer w0.178: v1@39.019,107.651 U2.3
  Bottom Layer w0.178: R19.1 33.655,102.565 ; R17.1 33.655,102.565 ; v1(39.034,107.651) 36.714,107.651 Q1.1 36.1,108.109 33.274,105.283 33.274,102.946 33.655,102.565
NetQ1_2: Q1.2 R16.2 | length 2.6
  Bottom Layer w0.178: R16.2 34.26,108.013 Q1.2
NetQ2_2: Q2.2 R19.2 | length 7.1
  Bottom Layer w0.178: R19.2 31.051,103.95 30.48,103.378 30.48,99.949 31.083,99.346 Q2.2
NetQ2_3: Q2.3 R18.1 | length 2.4
  Bottom Layer w0.178: R18.1@33.083,94.628 Q2.3
NetR15_1: R15.1 R16.1 U2.2 | length 11.2
  Top Layer w0.178: v1(32.639,106.68) 37.719,106.68 38.369,107.33 U2.2 38.369,110.348 38.1,110.617 v1(38.1,110.998)
  Bottom Layer w0.178: R16.1@31.801,106.68 v1(32.639,106.68) ; v1@38.049,111.049 R15.1
NetR20_2: R20.2 USB_1.2 | length 5.2
  Top Layer w0.178: USB_1.2 68.415,126.835 v1(68.453,126.873)
  Bottom Layer w0.178: v1(68.453,126.873) 68.578,126.998 R20.2
NetR21_2: R21.2 R22.2 USB_1.3 | length 6.7
  Top Layer w0.178: USB_1.3 65.659,127.635 66.421,128.397 v1(68.453,128.397)
  Bottom Layer w0.178: v1(68.453,128.397) 68.455,128.395 R21.2 R22.2
NetR23_2: R23.2 USB_2.2 | length 5.8
  Top Layer w0.178: USB_2.2 66.813,113.5 v1(68.555,111.758)
  Bottom Layer w0.178: v1(68.555,111.758) R23.2
NetR24_2: R24.2 R25.2 USB_2.3 | length 7.1
  Top Layer w0.178: USB_2.3 v1(66.243,114.3)
  Bottom Layer w0.178: v1(66.243,114.3) 68.645,114.3 R25.2 69.278,113.333 R24.2
PA0: Pulse.1 U1.14 | length 63.1
  Top Layer w0.178: v1(54.61,128.27) 54.968,127.912 U1.14 ; v1(55.372,120.777) 55.372,118.792 55.474,118.691 55.474,118.643 56.261,117.856 v1(57.404,117.856) ; v1(57.658,96.139) v1(57.658,114.935)
  Bottom Layer w0.178: Pulse.1 54.737,80.391 57.658,83.312 v1(57.658,96.139) ; v1(54.61,128.27) 55.982,126.898 55.982,121.387 v1(55.372,120.777) ; v1(57.404,117.856) 58.467,117.856 59.03,117.294 59.03,116.307 v1(57.658,114.935)
PA1: U1.15
PA3: U1.17
PA4: U1.20
PA5: U1.21
PA6: U1.22
PA7: U1.23
PA11: R20.1 U1.44 | length 43.9
  Top Layer w0.178: v1(43.72,123.412) U1.44 ; v1(69.85,120.523) 69.882,120.555 72.168,120.555 73.025,121.412 v1(73.025,127)
  Bottom Layer w0.178: v1(43.72,123.412) 43.688,123.444 42.418,123.444 42.418,123.063 45.542,119.939 58.2,119.939 58.517,119.621 60.803,119.621 60.867,119.558 62.154,119.558 63.119,120.523 v1(69.85,120.523) ; R20.1 v1(73.025,127)
PA12: R21.1 U1.45 | length 40.7
  Top Layer w0.178: v1@43.331,122.912 U1.45 ; v1(69.342,121.055) 71.779,121.055 72.263,121.539 72.263,127.635 v1(71.501,128.397)
  Bottom Layer w0.178: v1(43.307,122.936) 45.949,120.294 58.347,120.294 58.665,119.977 60.951,119.977 61.014,119.913 61.747,119.913 62.738,120.904 62.84,120.904 63.055,121.12 69.277,121.12 v1(69.342,121.055) ; R21.1 v1(71.501,128.397)
PC0: 2.4'/2.8'LCD.34 U1.8 | length 30.8
  Top Layer w0.178: U1.8 58.745,124.912 v1(58.832,124.999) ; v1@64.008,135.763 v1(64.008,135.766) 64.008,138.176 68.796,142.964 68.796,144.455 69.413,145.072 70.904,145.072 2.4'/2.8'LCD.34
  Bottom Layer w0.178: v1@58.801,124.999 60.706,126.904 60.706,130.302 64.008,133.604 v1(64.008,135.766)
PC1: R5.1 U1.9 | length 22
  Top Layer w0.178: U1.9 58.483,125.412 59.309,126.238 v1(59.309,126.619) ; v1(63.5,135.001) 65.51,135.001 65.65,134.861 66.049,134.861 66.189,135.001 67.815,135.001 v1(69.85,137.036)
  Bottom Layer w0.178: v1(59.309,126.619) 59.563,126.873 59.563,129.921 63.5,133.858 v1(63.5,135.001) ; v1(69.85,137.036) R5.1
PC2: 2.4'/2.8'LCD.29 U1.10 | length 23.8
  Top Layer w0.178: U1.10 57.967,125.912 v1(58.166,126.111) ; v1(63.119,135.766) 63.119,139.573 67.31,143.764 2.4'/2.8'LCD.29
  Bottom Layer w0.178: v1(58.166,126.111) 58.293,126.238 58.293,130.94 v1(63.119,135.766)
PC3: 2.4'/2.8'LCD.30 U1.11 | length 25.4
  Top Layer w0.178: U1.11 57.578,126.412 v1(57.658,126.492) ; v1(62.357,135.766) 62.357,140.114 65.824,143.581 65.824,145.072 2.4'/2.8'LCD.30
  Bottom Layer w0.178: v1@57.785,126.619 57.785,131.194 v1(62.357,135.766)
PC4: MLX90614.2 P1.2 R9.1 U1.24 | length 143.2
  Top Layer w0.178: v1(29.21,95.631) 29.489,95.352 29.489,94.796 30.687,93.599 63.5,93.599 v1(64.516,94.615) ; U1.24 50.934,132.468 v1(51.181,132.715) ; v1(59.309,135.001) 60.601,133.709 v1(60.601,132.566) ; v1(62.484,134.366) 62.967,133.883 67.92,133.883 v1(68.199,133.604) ; v1(68.199,131.191) 69.086,130.304 72.642,130.304 74.168,128.778 74.168,120.904 72.669,119.405 72.669,116.434 v1(73.025,116.078)
  Bottom Layer w0.178: v1(29.21,95.631) 29.21,81.661 P1.2 29.845,79.121 27.686,76.962 MLX90614.2 27.813,69.85 R9.1 ; v1(51.181,132.715) 57.023,132.715 v1(59.309,135.001) ; v1(60.601,132.566) 60.684,132.566 v1(62.484,134.366) ; v1(64.516,94.615) 73.914,94.615 73.914,114.3 73.025,115.189 v1(73.025,116.078) ; v1(68.199,131.191) v1(68.199,133.604)
PC5: MLX90614.1 P1.3 R10.1 U1.25 | length 136.5
  Top Layer w0.178: v1(29.972,94.996) 42.159,94.996 42.607,94.548 63.306,94.548 v1(64.389,95.631) ; U1.25 50.434,133.365 50.673,133.604 51.689,133.604 51.943,133.35 v1(51.943,132.207) ; v1(59.309,133.985) 59.309,132.588 v1(60.325,131.572) ; v1@62.357,133.35 63.024,133.35 63.026,133.352 66.8,133.352 v1(67.056,133.096) ; v1(67.691,130.683) 67.691,130.429 68.58,129.54 72.009,129.54 73.508,128.041 73.508,121.392 72.136,120.02 v1(72.136,115.951)
  Bottom Layer w0.178: v1(29.972,94.996) 29.972,83.439 P1.3 32.385,77.216 30.734,75.565 MLX90614.1 31.547,72.212 R10.1 ; v1(51.943,132.207) 57.531,132.207 v1(59.309,133.985) ; v1(60.325,131.572) 60.452,131.572 v1(62.23,133.35) ; v1(64.389,95.631) 72.898,95.631 72.898,101.686 73.026,101.814 73.026,114.553 72.136,115.443 v1(72.136,115.951) ; v1(67.056,133.096) 67.056,131.191 67.564,130.683 v1(67.691,130.683)
PC11: U1.52
PC12: U1.53
PC13: 2.4'/2.8'LCD.33 U1.2 | length 30.7
  Top Layer w0.178: U1.2 59.174,121.912 v1(60.706,123.444) ; v1(64.897,135.766) 64.897,136.525 2.4'/2.8'LCD.33
  Bottom Layer w0.178: v1(60.706,123.444) 60.833,123.444 61.341,123.952 61.341,130.429 64.897,133.985 v1(64.897,135.766)
PD2: U1.54
"PL2303 D+": R24.1 U2.15 | length 36.6
  Top Layer w0.178: U2.15@46.291,115.596 v1(46.661,115.596)
  Bottom Layer w0.178: v1@46.736,115.697 46.736,115.443 56.134,106.045 70.993,106.045 71.603,106.655 71.603,112.395 R24.1
"PL2303 D-": R23.1 U2.16 | length 30.2
  Top Layer w0.178: v1(45.518,117.247) 45.518,115.719 U2.16
  Bottom Layer w0.178: v1(45.518,117.247) 46.837,117.247 52.553,111.531 62.403,111.531 63.873,113.002 67.133,113.002 67.728,112.406 69.77,112.406 70.416,111.76 R23.1
RESET: 2.4'/2.8'LCD.5 C1.2 D3.1 R3.1 RESET.1 U1.7 | length 129.4
  Top Layer w0.178: 2.4'/2.8'LCD.5 36.83,145.067 35.776,146.121 35.776,146.995 38.006,149.225 50.546,149.225 v1@50.673,149.098 ; v1(54.991,118.491) 55.123,118.491 56.241,117.373 57.604,117.373 58.776,118.545 58.776,119.072 58.382,119.466 58.382,120.659 58.665,120.942 60.385,120.942 61.189,121.746 61.189,123.644 60.527,124.306 56.24,124.306 U1.7 59.134,124.412 59.792,125.07 59.792,126.819 58.61,128 v1(58.61,140.551)
  Bottom Layer w0.178: RESET.1@27.282,157.734 27.282,159.362 27.94,160.02 31.572,160.02 R3.1 33.528,159.334 ; C1.2 35.939,162.812 35.56,162.433 35.56,159.893 35.001,159.334 33.528,159.334 ; 2.4'/2.8'LCD.5 35.687,145.161 35.687,155.829 33.782,157.734 33.782,159.08 33.528,159.334 ; D3.1 45.72,106.172 47.625,108.077 47.625,113.03 45.339,115.316 44.247,115.316 43.713,115.849 43.713,117.421 44.45,118.157 44.45,118.491 46.228,118.491 46.558,118.821 54.661,118.821 v1(54.991,118.491) ; v1(50.736,149.06) 52.184,147.612 52.507,147.612 53.556,146.563 53.556,146.121 54.605,145.072 55.047,145.072 56.096,144.023 56.096,143.04 58.585,140.551 v1(58.61,140.551) ; v1@58.598,140.538 v1@58.674,140.462
RXD: PL2303.2 U2.5 | length 20.2
  Top Layer w0.178: v1(33.846,114.49) 35.052,113.411 38.481,113.411 40.319,111.573 U2.5
  Bottom Layer w0.178: PL2303.2 32.893,118.999 32.893,115.443 v1(33.846,114.49)
TXD: PL2303.1 U2.1 | length 15.4
  Top Layer w0.178: v1@33.528,113.665 34.315,112.878 36.728,112.878 36.83,112.776 36.83,111.252 37.719,110.363 U2.1
  Bottom Layer w0.178: 30.099,119.888 31.369,118.618 31.369,115.824 v1(33.465,113.728)
VCC3.3: 2.4'/2.8'LCD.24 2.4'/2.8'LCD.25 BlueTooth.5 BOOT.1 BOOT.2 C8.1 C9.1 C10.1 C11.1 C12.1 C13.2 C16.2 C22.1 C24.2 D1.1 D4.2 ECG.2 MLX90614.3 P1.1 Pulse.2 Q2.1 R2.1 R3.2 R9.2 R10.2 R14.1 R15.2 R17.2 R22.1 R25.1 R27.2 R28.2 U1.19 U1.32 U1.48 U1.64 U3.2 U3.4 VOUT2.2 VOUT2.4 VOUT2.6 | length 354
  Top Layer w0.178: P1.1 29.21,79.121 30.226,79.121 ; 30.353,79.121 43.307,79.121 Pulse.2 ; v1(34.747,160.719) 35.623,160.719 37.846,158.496 v1(37.846,157.353) ; C22.1 v1(35.56,142.265) ; v1(40.005,140.208) 39.116,139.319 v1(39.116,137.668) 39.369,137.415 U3.4 ; v1(41.275,119.761) 42.926,121.412 U1.48 46.609,121.412 v1(46.846,121.649) ; v1(42.799,152.908) 42.837,152.87 v1(49.085,152.87) 54.013,152.87 ; v1(44.958,138.049) 46.357,138.049 U3.2 ; v1(46.228,132.08) 46.934,131.374 U1.32 46.934,128.961 v1@47.277,128.618 ; v1@53.434,129.286 U1.19 ; ECG.2 54.102,81.788 56.261,83.947 C9.1 62.179,87.96 69.469,95.25 BlueTooth.5 ; U1.64 v1(54.434,121.649) 54.61,121.825 v1(54.61,125.857) ; 2.4'/2.8'LCD.25 2.4'/2.8'LCD.24 59.69,147.193 54.013,152.87 ; v1@68.58,154.114 67.335,152.87 54.013,152.87
  Bottom Layer w0.178: R27.2 R28.2 R3.2 v1(34.747,160.719) ; R10.2 30.166,71.245 R9.2 30.162,68.455 C16.2 ; MLX90614.3 30.162,67.754 C16.2 ; R17.2 35.369,103.95 ; v1(35.56,142.265) 35.916,142.265 ; v1(37.846,157.353) 37.846,157.023 38.481,156.388 D4.2 ; R15.2@39.421,111.647 R14.1 39.421,117.907 v1(41.275,119.761) ; R15.2 38.862,111.063 38.862,109.474 39.243,109.093 40.386,109.093 41.021,108.458 41.021,105.156 40.386,104.521 35.941,104.521 35.369,103.95 ; v1(40.005,140.208) 40.132,140.208 42.291,138.049 v1(44.958,138.049) ; D1.1 44.704,162.56 45.466,161.798 VOUT2.6 VOUT2.4 VOUT2.2 44.196,156.718 42.799,155.321 v1(42.799,152.908) 41.148,154.559 D4.2 ; Pulse.2 45.974,81.788 ECG.2 ; v1(46.228,132.08) 42.672,135.636 37.784,135.636 C24.2 38.927,137.668 v1(39.116,137.668) 39.116,139.065 35.916,142.265 ; v1(46.846,121.649) v1(54.434,121.649) ; v1(47.371,128.524) 48.006,127.889 C12.1 50.114,126.238 ; R2.1 48.26,125.349 49.149,126.238 50.114,126.238 ; C8.1 49.085,150.762 C13.2 v1(49.085,152.87) ; v1(53.391,129.286) 53.518,129.159 C11.1 53.518,126.746 ; C10.1@53.518,125.095 53.518,126.746 ; C10.1 54.432,125.857 v1(54.61,125.857) ; BlueTooth.5 69.469,102.489 72.39,105.41 72.39,114.3 71.755,114.935 R25.1 ; BOOT.2 BOOT.1 68.58,160.655 68.58,154.153 73.787,148.946 73.787,132.664 R22.1 ; C16.2 27.053,68.451 26.035,69.469 26.035,79.756 P1.1 28.321,82.042 28.321,97.155 29.083,97.917 32.604,97.917 Q2.1 34.957,99.346 35.56,99.949 35.56,103.759 35.369,103.95 ; 35.916,142.265 37.363,142.265 38.227,143.129 38.227,147.447 36.957,148.717 36.957,153.035 D4.2 ; 50.114,126.238 53.01,126.238 53.518,126.746
  other v1: 68.605,154.178
VCC5: 2.4'/2.8'LCD.28 C14.2 C18.1 C23.1 C25.2 D5.2 K1.2 K1.5 U2.8 U2.19 U2.20 U2.22 U2.23 U2.24 U3.3 VOUT3.2 VOUT3.4 VOUT3.6 | length 139.2
  Top Layer w0.178: v1(37.592,141.605) 37.084,141.097 37.084,136.017 38.354,134.747 v1(38.354,130.175) ; v1(38.862,141.986) 39.116,141.986 v1(40.005,142.875) ; U2.24 U2.23 ; v1(41.021,114.3) 40.969,114.352 U2.23 ; v1(41.148,110.744) v1(41.148,112.522) ; v1(41.656,121.158) 42.427,121.929 v1(42.451,121.929) ; U2.8 v1@42.269,110.309 ; U2.19 U2.20 42.971,117.176 v1(42.926,117.221) 41.91,117.221 41.619,116.93 U2.22 U2.23 ; v1(44.577,139.954) U3.3 v1(49.149,139.954) ; C23.1 v1(54.102,142.265) ; K1.5 65.303,156.886 v1(65.303,156.21) ; v1(63.525,142.926) 63.525,145.313 2.4'/2.8'LCD.28 v1@64.77,151.892
  Bottom Layer w0.178: v1(37.592,141.605) 37.973,141.986 v1(38.862,141.986) ; v1(38.354,130.175) 37.846,130.175 35.115,127.444 35.115,127.191 36.322,125.984 38.378,125.984 42.442,121.92 v1(42.451,121.929) ; D5.2 39.497,151.13 40.386,152.019 44.882,152.019 C18.1 45.796,152.603 46.988,153.795 C14.2 47.752,153.859 47.752,154.94 48.006,155.194 51.308,155.194 51.816,155.702 VOUT3.2 VOUT3.4 VOUT3.6 51.816,162.687 52.578,163.449 55.753,163.449 56.134,163.068 56.134,160.655 K1.2 K1.5 ; v1(40.005,142.875) 42.926,139.954 v1(44.577,139.954) ; v1(41.021,114.3) 41.148,114.173 v1(41.148,112.522) ; v1(41.148,110.744) 41.58,110.312 v1(42.266,110.312) ; v1(41.656,121.158) 42.926,119.888 v1(42.926,117.221) ; v1(49.149,139.954) 51.791,139.954 v1(54.102,142.265) 57.239,139.129 C25.2 63.5,140.905 63.5,142.9 v1(63.525,142.926) ; v1@63.5,142.926 v1@63.5,143.002 ; v1(64.795,152.019) 64.795,155.727 v1@65.278,156.21
pads on no net: 2.4'/2.8'LCD. 2.4'/2.8'LCD.32 "PA Header.1" "PA Header.2" "PA Header.3" "PA Header.4" "PA Header.5" "PA Header.6" "PA Header.7" "PA Header.8" "PA Header.9" "PA Header.12" "PA Header.13" "PA Header.15" "PA Header.16" BlueTooth.1 BlueTooth.6 ECG.3 ECG.4 K1.1 K1.6 U2.6 U2.9 U2.10 U2.11 U2.12 U2.13 U2.14 USB_1.4 USB_1.6 USB_1.7 USB_1.8 USB_1.9 USB_1.MH1 USB_1.MH2 USB_2.4 USB_2.6 USB_2.7 USB_2.8 USB_2.9 USB_2.MH1 USB_2.MH2 Y1. Y2. Y3.
copper on no net:
  other v1: 68.428,119.759

## Polygon pours and split planes (outlines as drawn)
GND on Top Layer "Top Layer-No Net" (solid, remove dead copper, pour order 5): 103.071,179.88 179.398,179.88 188.161,171.117 189.685,169.593 189.685,50.975 107.262,50.975 106.5,50.213
GND on Bottom Layer "Top Layer-No Net" (solid, remove dead copper, pour order 7): 96.882,180.104 97.39,179.596 172.828,179.596 172.828,70.249 161.017,58.438 160.636,58.057 98.914,58.057
no net on Internal Plane 1 (split plane): 74.128,65.661 25.148,65.661 25.148,164.641 74.128,164.641
no net on Internal Plane 2 (split plane): 74.128,65.661 25.148,65.661 25.148,164.641 74.128,164.641

## Keep-outs
Keep-Out Layer:
  lines w0.278: 44.323,70.485 46.228,70.485 46.228,77.597 42.926,77.597 42.926,70.485 44.704,70.485 ; 24.638,66.04 25.527,65.151 73.533,65.151 74.803,66.421 74.803,164.338 74.041,165.1 25.4,165.1 24.638,164.338 24.638,66.04

## Silkscreen, mask and mechanical layers (free items; w line width, h text height)
Top Overlay:
  text "PWR" at 58.42,163.576 h2
  text "3.3V" at 66.929,163.322 h2
  text "3.3V" at 43.053,163.195 h2
  text "GND" at 46.609,163.195 h2
  text "5V" at 50.673,163.195 h2
  text "GND" at 52.705,163.195 h2
  text "B0" at 65.024,159.004 h1
  text "B1" at 71.882,158.877 h1
  text "GND" at 66.802,153.924 h2
  text "PD2" at 57.023,132.842 h0.5
  text "PC12" at 58.039,132.08 h0.5 r90
  text "PC11" at 58.674,131.318 h0.5 r90
  text "PA10" at 30.861,122.174 h1
  text "RXD" at 33.147,122.174 h1
  text "PA9" at 30.861,119.634 h1
  text "TXD" at 32.766,119.634 h1
Bottom Overlay:
  text "By SCNU 夏梦" at 45.339,88.138 h2
  text "2014.11.06" at 45.212,86.233 h2

## Text inside footprints (layer, text, board x,y; h text height)
2.4'/2.8'LCD: Top Overlay "3.3" at 61.275,141.618 h0.71; Top Overlay "BL" at 59.275,141.618 h0.71; Top Overlay "MISO" at 66.025,141.618 h0.76; Top Overlay "TCS" at 71.4,141.618 h0.76; Top Overlay "MO" at 69.4,148.118 h0.76; Top Overlay "MOSI" at 66.15,148.118 h0.76; Top Overlay "CLK" at 71.4,148.118 h0.76; Top Overlay "PEN" at 69.025,141.618 h0.76; Top Overlay "D13" at 51.275,141.618 h0.71; Top Overlay "GND" at 63.775,141.618 h0.71; Top Overlay "GND" at 56.275,148.118 h0.71; Top Overlay "RD" at 33.775,148.118 h0.71; Top Overlay "D1" at 36.4,148.118 h0.71; Top Overlay "D12" at 48.65,148.118 h0.71; Top Overlay "3.3" at 58.775,148.118 h0.71; Top Overlay "GND" at 61.275,148.118 h0.71; Top Overlay "5V" at 63.9,148.118 h0.71; Top Overlay "D17" at 56.275,141.618 h0.71; Top Overlay "D14" at 51.275,148.118 h0.71; Top Overlay "D15" at 53.775,141.618 h0.71; Top Overlay "D11" at 48.775,141.618 h0.71; Top Overlay "D10" at 46.15,148.118 h0.71; Top Overlay "D7" at 44.025,148.118 h0.71; Top Overlay "D6" at 43.9,141.618 h0.71; Top Overlay "D5" at 41.4,148.118 h0.71; Top Overlay "D4" at 41.4,141.618 h0.71; Top Overlay "D3" at 38.9,148.118 h0.71; Top Overlay "D2" at 38.775,141.618 h0.71; Top Overlay "RST" at 36.025,141.618 h0.71; Top Overlay "WR" at 33.775,141.618 h0.71; Top Overlay "CS" at 31.275,141.618 h0.71; Top Overlay "RS" at 31.275,148.118 h0.71; Top Overlay "DB8" at 46.15,141.618 h0.71; Top Overlay "D16" at 53.775,148.118 h0.71
U3: Top Overlay "1" at 42.597,134.722 h1.27 r90; Top Overlay "3" at 42.597,139.294 h1.27 r90